# Altium PCB Controller_TRK.PcbDoc (part 1 of 2)
Units mm, origin at the board's own origin, x right, y up, seen from the top; angles counter-clockwise.
Board outline 95.06 x 95 mm, 2 copper layers (Top Layer, Bottom Layer); 192 components, 119 nets, 532 pads, 364 vias.
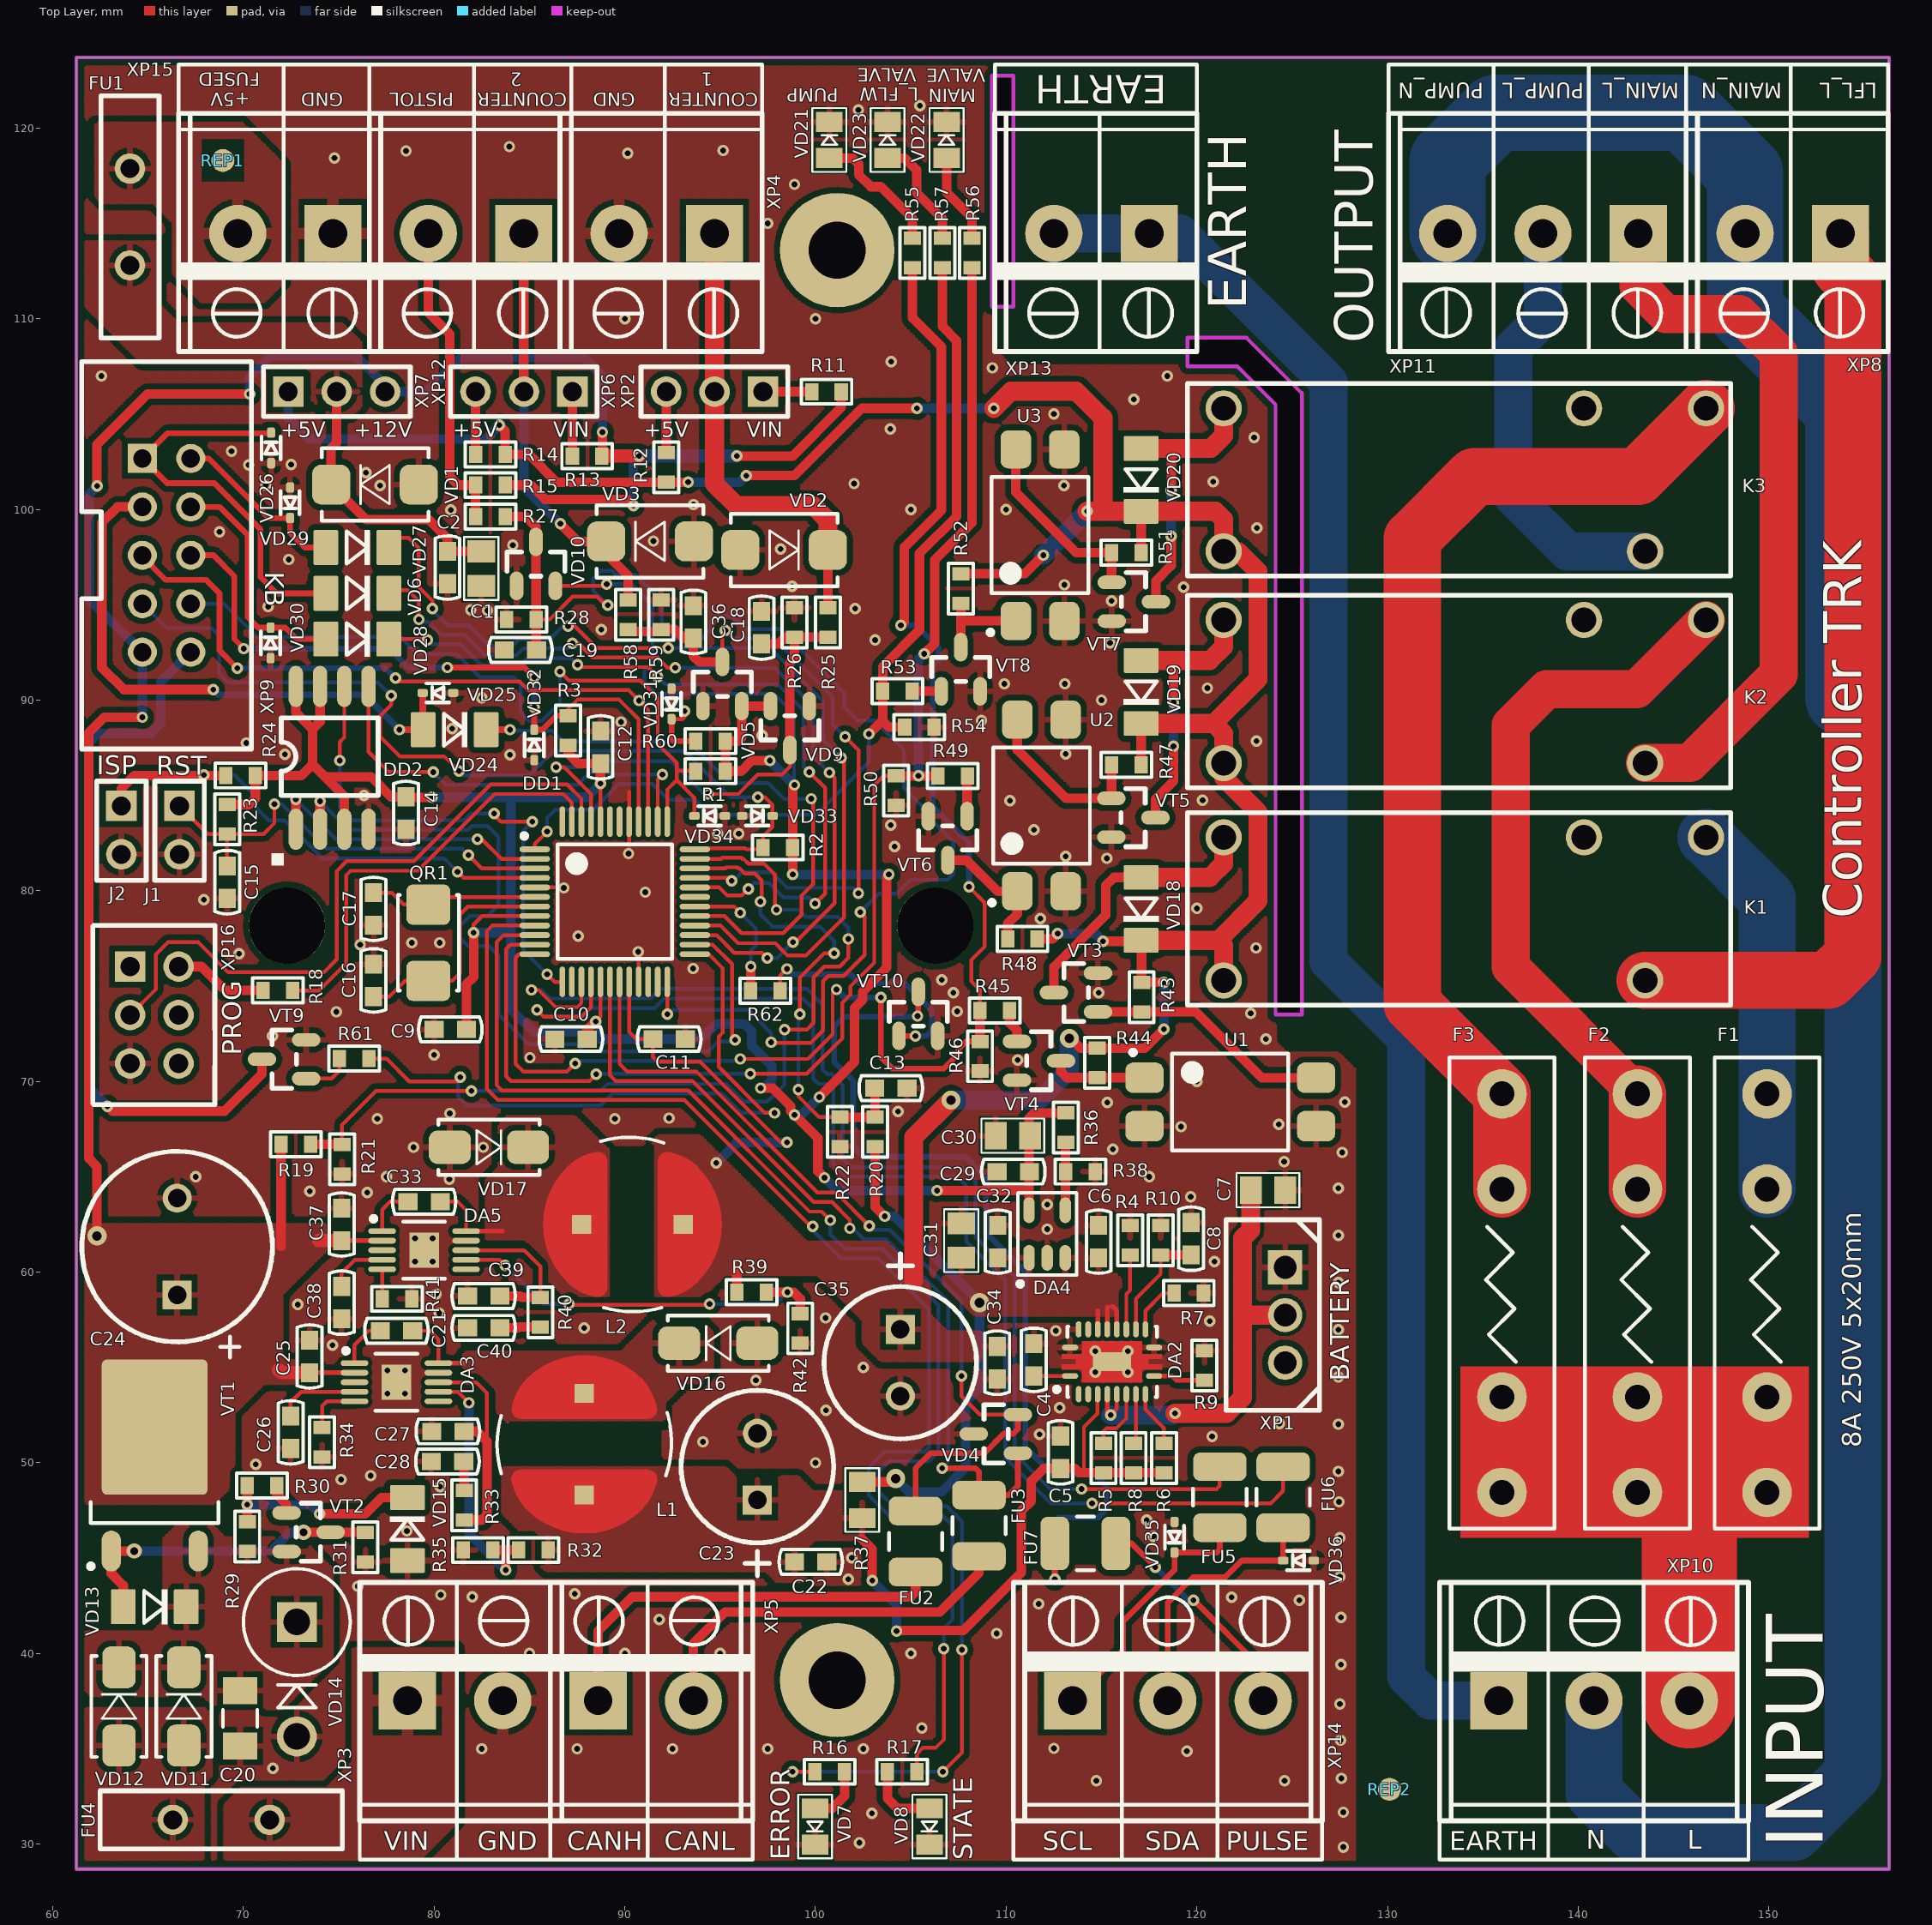
[diagram p0: Top Layer view]
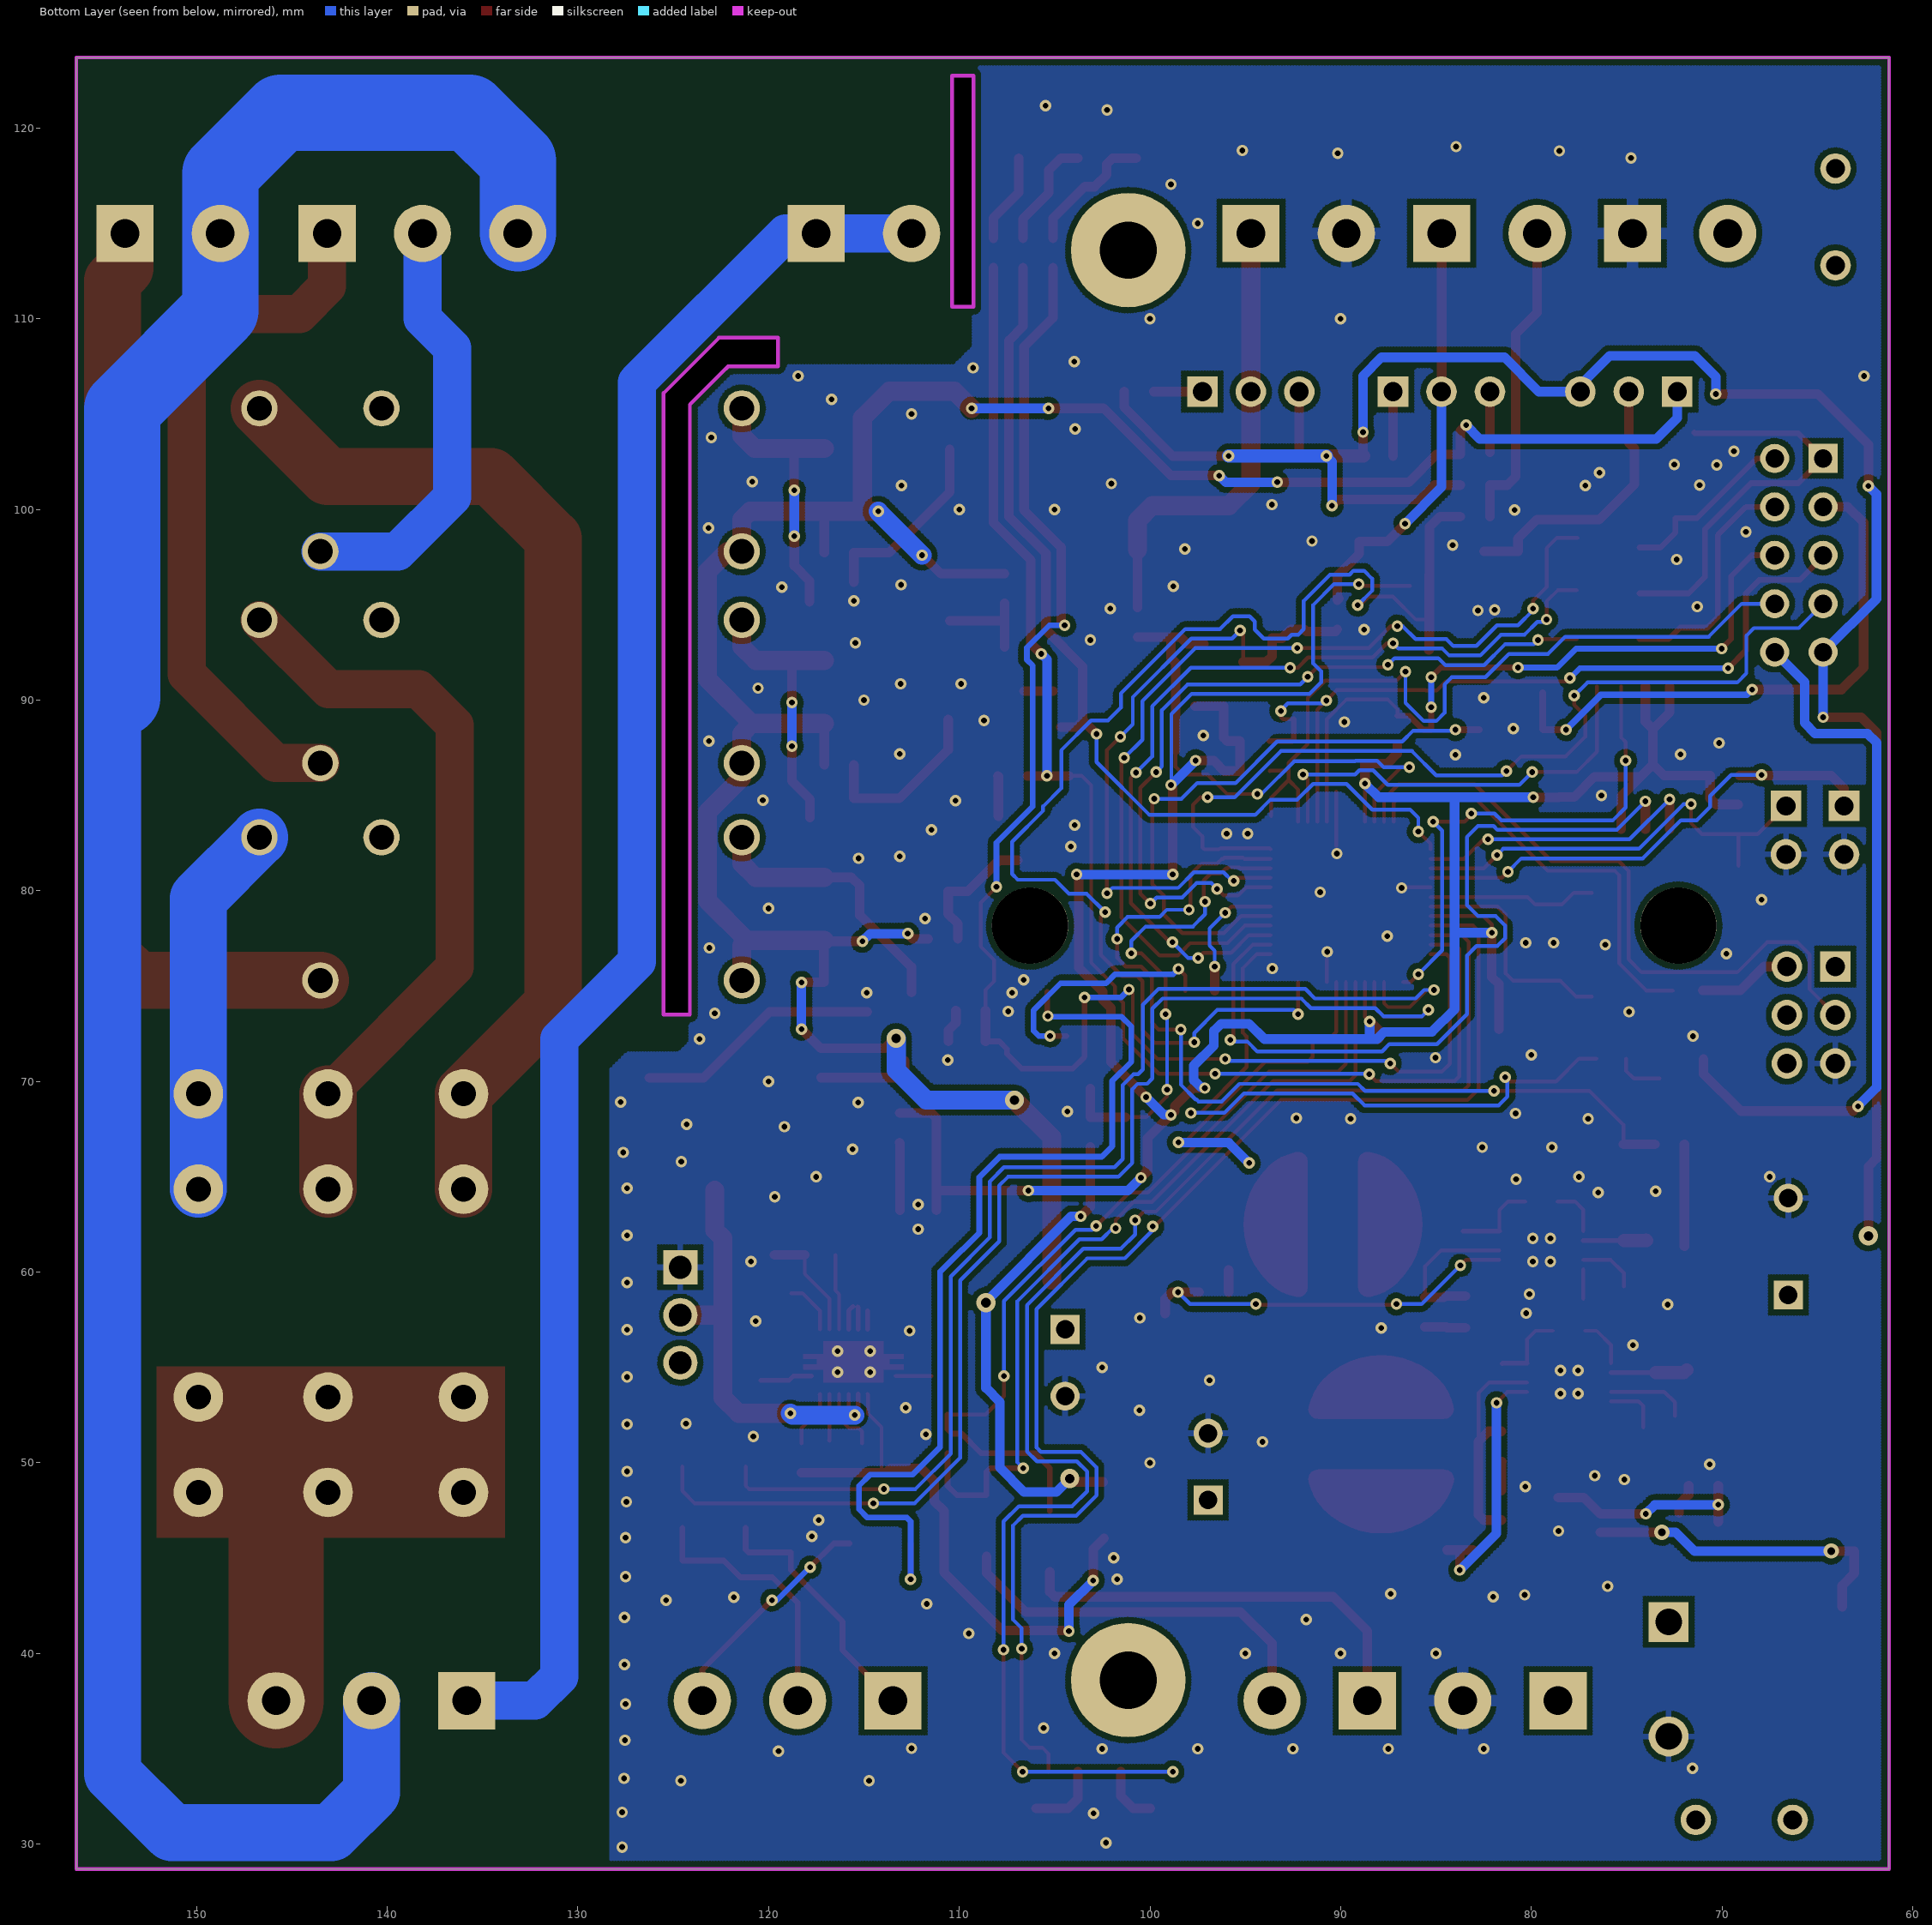
[diagram p1: Bottom Layer view, seen from below]

## Layer stack, top to bottom
Top Solder: solder mask 0.0102, Solder Resist, Dk 3.5
Top Layer: signal copper 0.0356
Dielectric 1: dielectric 0.32, FR-4, Dk 4.8
Bottom Layer: signal copper 0.0356
Bottom Solder: solder mask 0.0102, Solder Resist, Dk 3.5

## Board outline
61.238,28.702 156.3,28.702 156.3,123.702 61.238,123.702
cut-out: 109.25,110.625 110.375,110.625 110.375,122.75 109.25,122.75
cut-out: 119.5,109 122.6,109 123.6,108 125.5,106.1 125.5,73.5 124.125,73.5 124.125,105.5 122,107.5 119.5,107.5

## Design rules (kind name [scope] priority, off if disabled: settings)
Clearance Clearance_1 [InComponent('DA3') OR InComponent('DA5') OR InComponent('DA2') OR InComponent('DD1') OR InNet('NetC7_2')] p1: gap=0.2 ignorepadtopadclearanceinfootprint=FALSE except(0: Arc-Hole Track-Hole SMDPad-Hole THPad-Hole Via-Hole Fill-Hole Poly-Hole Region-Hole Text-Hole)
Clearance [All] p2: gap=0.3 ignorepadtopadclearanceinfootprint=FALSE except(0: Arc-Hole Track-Hole SMDPad-Hole THPad-Hole Via-Hole Fill-Hole Poly-Hole Region-Hole Text-Hole)
ComponentClearance [All] p1: gap=0.1 collisioncheckmode=3 verticalgap=2540 showdistances=FALSE
HoleSize [All] p1: absolutevalues=TRUE maxlimit=10 minlimit=0.025 maxpercent=80.000 minpercent=20.000
MinimumSolderMaskSliver [All] p1: minsoldermaskwidth=0.1
PolygonConnect PolygonConnect_2 [InComponent('XP3') OR InComponent('XP15') OR InComponent('XP4')] p1: connectstyle=Relief reliefconductorwidth=0.6 reliefentries=4 polygonreliefangle="90 Angle" airgapwidth=0.3
PolygonConnect PolygonConnect_1 [IsVia OR InComponent('DA1') AND InNet('NetDA1_2') OR InComponent('DA3') AND InNet('GND') OR InComponent('DA5') AND InNet('GND') OR InComponent('VT1') AND InNet('VIN_F')] p2: connectstyle=Direct reliefconductorwidth=0.254 reliefentries=4 polygonreliefangle="90 Angle" airgapwidth=0.254
PolygonConnect [All] p3: connectstyle=Relief reliefconductorwidth=0.3 reliefentries=4 polygonreliefangle="90 Angle" airgapwidth=0.3
RoutingVias [All] p1: holewidth=0.4 width=0.8 viastyle="Through Hole" minholewidth=0.3 minwidth=0.6 maxholewidth=0.5 maxwidth=1
SilkToSilkClearance [All] p1: silktosilkclearance=0.05
SolderMaskExpansion [All] p1: expansion=0.102
Width [All] p1: maxlimit=7 minlimit=0.2 preferedwidth=0.5
26 further rules are at their usual default settings.

## Classes and differential pairs
component class Keyboard: R1 R2 R3 R60 R61 VD6 VD24 VD25 VD26 VD27 VD28 VD29 VD30 VD31 VD32 VD33 VD34 VT9
component class 5V_Source: C1 C2 FU1 VD1 XP7
component class Battery: C4 C5 C6 C7 C8 DA2 R4 R5 R6 R7 R8 R9 R10 XP1
component class Connections: FU2 FU3 FU5 FU6 FU7 R11 R12 R13 R14 R15 R62 VD2 VD3 VD4 VD35 VD36 VT10 XP2 XP3 XP4 XP5 XP6 XP8 XP9 XP10 XP11 XP12 XP13 XP14 XP15
component class CPU: C9 C10 C11 C12 C13 C14 C15 C16 C17 DD1 DD2 J1 J2 QR1 R16 R17 R18 R19 R20 R21 R22 R23 R24 REP1 REP2 VD7 VD8 XP16
component class Input: C18 C19 C36 R25 R26 R27 R28 R58 R59 VD5 VD9 VD10
component class Power_1: C33 C34 C35 C37 C38 C39 C40 DA5 L2 R39 R40 R41 R42 VD17
component class Power: C20 C21 C22 C23 C24 C25 C26 C27 C28 C29 C30 C31 C32 DA3 DA4 FU4 L1 R29 R30 R31 R32 R33 R34 R35 R36 R37 R38 VD11 VD12 VD13 VD14 VD15 VD16 VT1 VT2
component class Relay: F1 F2 F3 K1 K2 K3 R43 R44 R45 R46 R47 R48 R49 R50 R51 R52 R53 R54 R55 R56 R57 U1 U2 U3 VD18 VD19 VD20 VD21 VD22 VD23 VT3 VT4 VT5 VT6 VT7 VT8

## Components (designator, comment, footprint, x,y, rotation, side; value= is the part's Value field where it differs from the comment)
C1 "10uF" CC0805 82.475,96.9 r90 top
C2 "0.1uF" CC0603 80.7,96.95 r90 top
C4 "0.1uF" CC0603 111.45,55.4 r90 top
C5 "1uF" CC0603 112.85,50.55 r90 top
C6 "1uF" CC0603 114.85,61.6 r270 top
C7 "10uFx6.3V" CC0805 123.725,64.3 r180 top
C8 "10nF" CC0603 119.7,61.75 r90 top
C9 "0.1uF" CC0603 80.85,72.725 r180 top
C10 "0.1uF" CC0603 87.175,72.223 r0 top
C11 "0.1uF" CC0603 92.325,72.225 r180 top
C12 "0.1uF" CC0603 88.725,87.525 r270 top
C13 "0.1uF" CC0603 103.95,69.65 r180 top
C14 "CC0603" CC0603 78.525,84.075 r90 top
C15 "220pF" CC0603 69.15,80.45 r90 top
C16 "22pF" CC0603 76.825,75.3 r270 top
C17 "22pF" CC0603 76.827,79.05 r90 top
C18 "0.1uF" CC0603 97.175,93.8 r270 top
C19 "0.1uF" CC0603 84.525,92.625 r0 top
C20 "0.1uFx250V" CC1206 69.825,36.6 r90 top
C21 "0.1 uF" CC0603 78.025,56.925 r180 top
C22 "0.1 uF" CC0603 99.75,44.8 r0 top
C23 "1000uFx6.3V" CC8X3.5 96.95,48.05 r90 top
C24 "470uFx35V" CC16X10_CAP0.5(1)(Primary) 66.525,58.8 r90 top
C25 "0.1 uF" CC0603 73.475,55.575 r90 top
C26 "10 nF" CC0603 72.475,51.6 r270 top
C27 "330pF" CC0603 80.725,51.65 r180 top
C28 "560pF" CC0603 80.7,50.075 r180 top
C29 "0.1uF" CC0603 110.375,65.275 r180 top
C30 "10uFx6.3V" CC0805 110.35,67.15 r0 top
C31 "10uF 6.3V" CC0805 107.65,61.65 r270 top
C32 "0.1uF" CC0603 109.55,61.6 r90 top
C33 "0.1 uF" CC0603 79.475,63.7 r180 top
C34 "0.1 uF" CC0603 109.525,55.25 r270 top
C35 "1000uFx6.3V" CC8X3.5 104.45,57 r270 top
C36 "0.1uF" CC0603 93.6,94.1 r270 top
C37 "0.1 uF" CC0603 75.15,62.5 r90 top
C38 "10 nF" CC0603 75.15,58.4 r270 top
C39 "330pF" CC0603 82.6,58.75 r180 top
C40 "560pF" CC0603 82.6,57.075 r180 top
DA2 "BQ24070" P-PQFP-N20 115.55,55.3 r0 top
DA3 "TPS54260DGQ" S-PDSO-G10 75.825,55.225 r0 top
DA4 "AP2210K-ADJTRG1" SOT23-5 112.15,62 r90 top
DA5 "TPS54260DGQ" S-PDSO-G10 77.275,62.15 r0 top
DD1 "LPC11C24FBD48" LQFP-48 89.475,79.425 r0 top
DD2 "M25PE16-VMW" EIAJ_SO8 72.75,83.225 r90 top
F1 "KLS5-266(5x20) 2pcs" Fuse_5x20 149.9,48.45 r90 top
F2 "KLS5-266(5x20) 2pcs" Fuse_5x20 143.1,48.45 r90 top
F3 "KLS5-266(5x20) 2pcs" Fuse_5x20 136,48.45 r90 top
FU1 "RXE-030" RXE-110 64.05,117.875 r270 top
FU2 "MICROSMD010F-2" RC1210#1 105.25,45.875 r270 top
FU3 "MICROSMD010F-2" RC1210#1 108.575,46.7 r270 top
FU4 "RXE-110" RXE-110 71.375,31.275 r180 top
FU5 "MICROSMD010F-2" RC1210#2 121.2,48.2 r90 top
FU6 "MICROSMD010F-2" RC1210#2 124.525,48.2 r90 top
FU7 "MICROSMD010F-2" RC1210#2 114.15,45.775 r0 top
J1 "PLS-02" PLS-02 66.65,84.45 r270 top
J2 "PLS-02" PLS-02 63.6,84.45 r270 top
K1 "RY21" RY21_RY21(Primary) 121.4,82.8 r0 top
K2 "RY21" RY21_RY21(Primary) 121.4,94.2 r0 top
K3 "RY21" RY21_RY21(Primary) 121.4,105.3 r0 top
L1 "15uH" SDR0805 87.875,50.975 r270 top
L2 "15uH" SDR0805 90.4,62.5 r0 top
QR1 "NX5032GA-12.000MHz LN-CD-1" AC5032_2 79.7,77.275 r270 top
R1 "10k" RC0603#1 94.5,86.275 r180 top
R2 "10k" RC0603#1 98.025,82.275 r180 top
R3 "10k" RC0603#1 87.025,88.4 r90 top
R4 "51k" RC0603#2 116.5,61.675 r90 top
R5 "100k" RC0603#2 115.1,50.25 r270 top
R6 "100k" RC0603#2 118.275,50.25 r270 top
R7 "10k" RC0603#2 119.575,58.9 r0 top
R8 "100k" RC0603#2 116.675,50.25 r270 top
R9 "2k" RC0603#2 120.4,55.1 r90 top
R10 "36k" RC0603#2 118.1,61.675 r90 top
R11 "10k" RC0603#2 100.575,106.175 r180 top
R12 "10k" RC0603#2 92.175,102.2 r90 top
R13 "10k" RC0603#2 88.025,102.8 r180 top
R14 "10k" RC0603#2 82.95,102.875 r180 top
R15 "10k" RC0603#2 82.95,101.275 r0 top
R16 "1k" RC0603#2 100.75,33.8 r180 top
R17 "1k" RC0603#2 104.55,33.8 r0 top
R18 "100E" RC0603#2 71.8,74.775 r180 top
R19 "100k" RC0603#2 72.75,66.7 r180 top
R20 "10k" RC0603#2 103.125,67.35 r270 top
R21 "10k" RC0603#2 75.175,65.925 r90 top
R22 "10k" RC0603#2 101.275,67.35 r90 top
R23 "10k" RC0603#2 69.15,83.75 r270 top
R24 "10k" RC0603#2 69.85,86.05 r180 top
R25 "100k" RC0603#2 100.65,94.075 r270 top
R26 "33k" RC0603#2 98.9,94.075 r270 top
R27 "100k" RC0603#2 82.95,99.625 r0 top
R28 "33k" RC0603#2 84.575,94.225 r0 top
R29 "220k" RC0603#2 70.2,46.125 r270 top
R30 "220k" RC0603#2 70.975,48.8 r180 top
R31 "220k" RC0603#2 76.4,45.575 r90 top
R32 "48k7 1%" RC0603#2 85.2,45.425 r0 top
R33 "12k" RC0603#2 81.575,47.775 r270 top
R34 "240k" RC0603#2 74.125,51.075 r90 top
R35 "11k 1%" RC0603#2 82.3,45.425 r0 top
R36 "11k 1%" RC0603#2 113.125,67.575 r90 top
R37 "n.p" RC0805 102.45,48.05 r90 top
R38 "18k 1%" RC0603#2 113.9,65.275 r180 top
R39 "68k1 1%" RC0603#2 96.65,58.95 r180 top
R40 "12k" RC0603#2 85.575,57.9 r90 top
R41 "240k" RC0603#2 78.05,58.6 r180 top
R42 "13k 1%" RC0603#2 99.2,57.05 r90 top
R43 "4k7" RC0603#2 117.1,74.425 r90 top
R44 "220E" RC0603#2 114.775,70.975 r90 top
R45 "10k" RC0603#2 109.4,73.725 r180 top
R46 "100k" RC0603#2 108.625,71.325 r90 top
R47 "4k7" RC0603#2 116.3,86.6 r0 top
R48 "220E" RC0603#2 110.85,77.475 r0 top
R49 "10k" RC0603#2 107.2,86.025 r180 top
R50 "100k" RC0603#2 104.225,85.25 r90 top
R51 "4k7" RC0603#2 116.3,97.725 r0 top
R52 "220E" RC0603#2 107.625,95.85 r90 top
R53 "10k" RC0603#2 104.3,90.475 r180 top
R54 "100k" RC0603#2 105.45,88.575 r180 top
R55 "1k" RC0603#2 105.075,113.45 r90 top
R56 "1k" RC0603#2 108.2,113.45 r90 top
R57 "1k" RC0603#2 106.65,113.45 r90 top
R58 "100k" RC0603#2 90.175,94.475 r270 top
R59 "33k" RC0603#2 91.9,94.475 r270 top
R60 "10k" RC0603#1 94.5,87.85 r180 top
R61 "4k7" RC0603#1 75.8,71.2 r180 top
R62 "4k7" RC0603#1 97.375,74.75 r0 top
REP1 "REPER_POINT_1.2" REPER1.2 68.925,118.3 r90 top
REP2 "REPER_POINT_1.2" REPER1.2 130.1,32.875 r90 top
U1 "K10102C" PC817 121.75,68.925 r0 top
U2 "K10102C" PC817 111.85,84.475 r90 top
U3 "K10102C" PC817 111.775,98.65 r90 top
VD1 "SMBJ15CA" SMB 76.9,101.3 r0 top
VD2 "SMBJ15CA" SMB 98.35,97.875 r180 top
VD3 "SMBJ15CA" SMB 91.325,98.325 r0 top
VD4 "PESD2CAN" SOT-23(123)#1 110.625,50.5 r0 top
VD5 "BAT54S" SOT-23(GSD) 94.1,89.675 r0 top
VD6 "LL4148" SOD-80#1 75.975,95.6 r180 top
VD7 "LED_0805" LED0805 99.975,31.875 r270 top
VD8 "LED_0805" LED0805 105.975,31.875 r270 top
VD9 "BAT54S" SOT-23(GSD) 99.675,89.7 r180 top
VD10 "BAT54S" SOT-23(GSD) 84.325,95.975 r0 top
VD11 "GS1M" SMA 66.875,37.225 r90 top
VD12 "n.p" SMA 63.475,37.225 r90 top
VD13 "BZV55C15" SOD-80#2 65.35,42.45 r180 top
VD14 "1.5KE150A" DO-201 72.8,35.65 r90 top
VD15 "BZV55C39" SOD-80#2 78.6,46.525 r270 top
VD16 "SK34SMA" SMA 94.9,56.275 r180 top
VD17 "SK34SMA" SMA 82.875,66.55 r0 top
VD18 "LL4148" SOD-80#2 117.075,79.05 r90 top
VD19 "LL4148" SOD-80#2 117.075,90.425 r90 top
VD20 "LL4148" SOD-80#2 117.075,101.55 r90 top
VD21 "LED_0805" LED0805 100.725,118.425 r90 top
VD22 "LED_0805" LED0805 106.875,118.425 r90 top
VD23 "LED_0805" LED0805 103.775,118.425 r90 top
VD24 "LL4148" SOD-80#1 81.075,88.45 r180 top
VD25 "ESD5Z3.3T1G/T5G" SOD-523 80.2,90.375 r180 top
VD26 "ESD5Z3.3T1G/T5G" SOD-523 71.45,103.225 r90 top
VD27 "LL4148" SOD-80#1 75.975,98 r180 top
VD28 "LL4148" SOD-80#1 75.975,93.2 r180 top
VD29 "ESD5Z3.3T1G/T5G" SOD-523 72.45,100.35 r270 top
VD30 "ESD5Z3.3T1G/T5G" SOD-523 71.425,93 r90 top
VD31 "ESD5Z3.3T1G/T5G" SOD-523 92.45,89.8 r270 top
VD32 "ESD5Z3.3T1G/T5G" SOD-523 85.25,87.65 r90 top
VD33 "ESD5Z3.3T1G/T5G" SOD-523 96.95,83.925 r0 top
VD34 "ESD5Z3.3T1G/T5G" SOD-523 94.45,83.925 r180 top
VD35 "ESD5Z3.3T1G/T5G" SOD-523 118.825,46.1 r270 top
VD36 "ESD5Z3.3T1G/T5G" SOD-523 125.325,44.875 r180 top
VT1 "IRFR9220" D-PAK(TO-252AA) 65.35,49.875 r90 top
VT2 "BC857" SOT-23(123)#1 72.25,47.375 r180 top
VT3 "BC817-40" SOT-23(123)#1 114.825,73.65 r0 top
VT4 "BC817-40" SOT-23(123)#1 110.55,72.1 r180 top
VT5 "BC817-40" SOT-23(123)#1 115.5,84.85 r180 top
VT6 "BC817-40" SOT-23(123)#1 107.95,83.925 r90 top
VT7 "BC817-40" SOT-23(123)#1 115.525,96.175 r180 top
VT8 "BC817-40" SOT-23(123)#1 106.6,90.45 r270 top
VT9 "BC817-40" SOT-23(123)#2 73.3,70.15 r0 top
VT10 "BC817-40" SOT-23(123)#2 104.375,72.375 r270 top
XP1 "MW03D" MW03D 124.625,60.25 r270 top
XP2 "PLS03" PLS-03#1 97.25,106.175 r180 top
XP3 "DG330-2PIN" DG330-2PIN 81.2,37.5 r0 top
XP4 "DG330-2PIN" DG330-2PIN 92.1,114.5 r180 top
XP5 "DG330-2PIN" DG330-2PIN 91.2,37.5 r0 top
XP6 "PLS03" PLS-03#1 87.25,106.175 r180 top
XP7 "PLS03" PLS-03#2 72.35,106.175 r0 top
XP8 "DG330-2PIN" DG330-2PIN 151.15,114.5 r180 top
XP9 "BH-10" BH-10 64.7,102.675 r270 top
XP10 "DG330-3PIN" DG330-3PIN 140.825,37.525 r0 top
XP11 "DG330-3PIN" DG330-3PIN 138.15,114.475 r180 top
XP12 "DG330-2PIN" DG330-2PIN 82.1,114.5 r180 top
XP13 "DG330-2PIN" DG330-2PIN 114.9,114.5 r180 top
XP14 "DG330-3PIN" DG330-3PIN 118.475,37.525 r0 top
XP15 "DG330-2PIN" DG330-2PIN 72.1,114.5 r180 top
XP16 "PLD-06" PIN6 64.06,76.025 r270 top

## Footprints (in the part's own frame and the unit in brackets; to place one, negate y for a bottom-side part, rotate by r counter-clockwise, add the part's x,y. Pads: shape width x height; smd on the part's side, far side on the other; paste and mask are expansions set on the pad)
AC5032_2 [mm]
  rrect30% 2.1x2.3 smd mask+0.05: 1(-2,0) 2(2,0)
  silkscreen extent -2.5,-1.6 2.5,1.6
BH-10 [mil]
  rect 60x60 hole 38: 1(0,0)
  round 60 hole 38: 2(0,100) 3(100,0) 4(100,100) 5(200,0) 6(200,100) 7(300,0) 8(300,100) 9(400,0) 10(400,100)
  silkscreen extent -200,-125 600,225
CC8X3.5 [mil]
  rect 60x60 hole 38 mask+1.97: 1(0,0)
  round 60 hole 38 mask+1.97: 2(137.8,0)
  silkscreen extent -156,-157 226,157
CC16X10_CAP0.5(1)(Primary) [mil]
  round 60 hole 38 mask+1.97: 1(200,0)
  rect 60x60 hole 38 mask+1.97: 2(0,0)
  silkscreen extent -97,-197 297,197
CC0603 [mm]
  rect 1x0.9 smd paste-25.4 mask+0.05: 1(-0.85,0) 2(0.85,0)
  silkscreen extent -1.66,-0.65 1.66,0.65
CC0805 [mm]
  rect 1.15x1.45 smd paste-25.4 mask+0.05: 1(-0.9,0) 2(0.9,0)
  silkscreen extent -1.65,-0.9 1.65,0.9
CC1206 [mm]
  rect 1.4x1.8 smd paste-25.4 mask+0.05: 1(-1.45,0) 2(1.45,0)
  silkscreen extent -0.45,-0.9 0.45,0.9
D-PAK(TO-252AA) [mm]
  oval 2.15x1 smd mask+0.05: 1(-4.5,2.28) 3(-4.5,-2.28)
  rrect10% 7.1x5.55 smd mask+0.05: 2(2,0)
  silkscreen extent -5.42,-3.35 -1.92,3.47
DG330-2PIN [mm]
  rect 3x3 hole 1.5 mask+0.05: 1(-2.6,0.025)
  round 3 hole 1.5 mask+0.05: 2(2.4,0.025)
  silkscreen extent -5.1,-6.27 5.6,6.23
DG330-3PIN [mm]
  rect 3x3 hole 1.5: 1(-5,0)
  round 3 hole 1.5: 2(0,0) 3(5,0)
  silkscreen extent -8.1,-6.3 8.1,6.2
DO-201 [mm]
  round 2.1 hole 1.4 mask+0.05: 1(0,0)
  rect 2.1x2.1 hole 1.4 mask+0.05: 2(6,0)
  silkscreen extent 1.5,-2.8 8.8,2.8
EIAJ_SO8 [mil]
  oval 85x29.53 smd mask+1.97: 1(0,0) 2(0,-50) 3(0,-100) 4(0,-150) 5(295,-150) 6(295,-100) 7(295,-50) 8(295,0)
  silkscreen extent -75,-170 230,50
Fuse_5x20 [mm]
  round 2.6 hole 1.3 mask+0.05: 1(0,0) 1(5,0) 2(15.9,0) 2(20.9,0)
  silkscreen extent -1.9,-2.75 22.8,2.75
LED0805 [mm]
  rect 1.05x1.4 smd paste-25.4 mask+0.05: 1(0,0) 2(1.9,0)
  silkscreen extent -0.72,-0.89 2.62,0.89
LQFP-48 [mm]
  oval 1.6x0.3 smd mask+0.05: 1(-4.2,2.75) 2(-4.2,2.25) 3(-4.2,1.75) 4(-4.2,1.25) 5(-4.2,0.75) 6(-4.2,0.25) 7(-4.2,-0.25) 8(-4.2,-0.75) 9(-4.2,-1.25) 10(-4.2,-1.75) 11(-4.2,-2.25) 12(-4.2,-2.75) 25(4.2,-2.75) 26(4.2,-2.25) 27(4.2,-1.75) 28(4.2,-1.25) 29(4.2,-0.75) 30(4.2,-0.25) 31(4.2,0.25) 32(4.2,0.75) 33(4.2,1.25) 34(4.2,1.75) 35(4.2,2.25) 36(4.2,2.75)
  oval 0.3x1.6 smd mask+0.05: 13(-2.75,-4.2) 14(-2.25,-4.2) 15(-1.75,-4.2) 16(-1.25,-4.2) 17(-0.75,-4.2) 18(-0.25,-4.2) 19(0.25,-4.2) 20(0.75,-4.2) 21(1.25,-4.2) 22(1.75,-4.2) 23(2.25,-4.2) 24(2.75,-4.2) 37(2.75,4.2) 38(2.25,4.2) 39(1.75,4.2) 40(1.25,4.2) 41(0.75,4.2) 42(0.25,4.2) 43(-0.25,4.2) 44(-0.75,4.2) 45(-1.25,4.2) 46(-1.75,4.2) 47(-2.25,4.2) 48(-2.75,4.2)
  silkscreen extent -4.87,-3 3,3.57
MW03D [mm]
  rect 1.8x1.8 hole 1.2 mask+0.05: 1(0,0)
  round 1.8 hole 1.2 mask+0.05: 2(2.5,0) 3(5,0)
  silkscreen extent -2.5,-3.1 7.5,1.8
P-PQFP-N20 [mm]
  oval 0.85x0.3 smd mask+0.05: 1(-2.2,-0.75) 10(2.2,-0.75) 11(2.2,0.75) 20(-2.2,0.75)
  oval 0.3x0.85 smd mask+0.05: 2(-1.75,-1.7) 3(-1.25,-1.7) 4(-0.75,-1.7) 5(-0.25,-1.7) 6(0.25,-1.7) 7(0.75,-1.7) 8(1.25,-1.7) 9(1.75,-1.7) 12(1.75,1.7) 13(1.25,1.7) 14(0.75,1.7) 15(0.25,1.7) 16(-0.25,1.7) 17(-0.75,1.7) 18(-1.25,1.7) 19(-1.75,1.7)
  rect 2x1 smd paste-25.4 mask+0.05: 21(0,0)
  Top Layer region: -1.575,-1.075 1.575,-1.075 1.575,-0.4 2.625,-0.4 2.625,-0.15 1.9,-0.15 1.9,0.15 2.625,0.15 2.625,0.4 1.575,0.4 1.575,1.075 -1.575,1.075 -1.575,0.4 -2.625,0.4 -2.625,0.15 -1.9,0.15 -1.9,-0.15 -2.625,-0.15 -2.625,-0.4 -1.575,-0.4
  silkscreen extent -3.02,-1.85 2.35,1.85
PC817 [mm]
  rrect50% 2x1.6 smd mask+0.05: 1(-4.5,1.27) 2(-4.5,-1.27) 3(4.5,-1.27) 4(4.5,1.27)
  silkscreen extent -5.22,-2.54 3.05,2.72
PIN6 [mm]
  rect 1.6x1.6 hole 1 mask+0.05: 1(0,0)
  round 1.6 hole 1 mask+0.05: 2(0,2.54) 3(2.54,0) 4(2.54,2.54) 5(5.08,0) 6(5.08,2.54)
  silkscreen extent -2.16,-1.96 7.24,4.45
PLS-02 [mm]
  rect 1.6x1.6 hole 1 mask+0.05: 1(0,0)
  round 1.6 hole 1 mask+0.05: 2(2.54,0)
  silkscreen extent -1.3,-1.3 3.9,1.3
PLS-03#1 [mm]
  rect 1.6x1.6 hole 1 mask+0.05: 1(0,0)
  round 1.6 hole 1 mask+0.05: 2(2.54,0) 3(5.08,0)
  silkscreen extent -1.3,-1.3 6.4,1.3
PLS-03#2 [mm]
  rect 1.6x1.6 hole 1: 1(0,0)
  round 1.6 hole 1: 2(2.54,0) 3(5.08,0)
  silkscreen extent -1.3,-1.3 6.4,1.3
RC0603#1 [mm]
  rect 0.7x0.9 smd paste-25.4: 1(-0.775,0) 2(0.774,0)
  silkscreen extent -1.32,-0.65 1.33,0.65
RC0603#2 [mm]
  rect 0.7x0.9 smd paste-25.4 mask+0.05: 1(-0.775,0) 2(0.774,0)
  silkscreen extent -1.32,-0.65 1.33,0.65
RC0805 [mm]
  rect 1.05x1.4 smd paste-25.4 mask+0.05: 1(-0.95,0) 2(0.95,0)
  silkscreen extent -1.67,-0.89 1.67,0.89
RC1210#1 [mm]
  rrect50% 1.5x2.8 smd mask+0.05: 1(-1.6,0) 2(1.6,0)
  silkscreen extent -0.45,-1.4 0.45,1.4
RC1210#2 [mm]
  rrect50% 1.5x2.8 smd: 1(-1.6,0) 2(1.6,0)
  silkscreen extent -0.45,-1.4 0.45,1.4
REPER1.2 [mm]
  round 1.2 smd paste-25.4 mask-25.4: 1(0,0)
  Top Layer pour cut-out: -1.2,-1.2 1.2,-1.2 1.2,1.2 -1.2,1.2
RXE-110 [mm]
  round 1.6 hole 1 mask+0.05: 1(0,0) 2(5.08,0)
  silkscreen extent -3.81,-1.52 8.89,1.52
RY21_RY21(Primary) [mm]
  round 1.9 hole 1.3 mask+0.05: 1(0,-7.5) 2(0,0) 11(22.1,-7.5) 12(18.9,0) 14(25.3,0)
  silkscreen extent -1.9,-8.8 26.6,1.3
S-PDSO-G10 [mm]
  oval 1.45x0.3 smd mask+0.05: 1(0,0) 2(0,-0.5) 3(0,-1) 4(0,-1.5) 5(0,-2) 6(4.4,-2) 7(4.4,-1.5) 8(4.4,-1) 9(4.4,-0.5) 10(4.4,0)
  rect 1.55x1.85 smd mask+0.05: 11(2.2,-1)
  silkscreen extent -0.57,-2.5 3.3,0.77
SDR0805 [mm]
  rect 1x1 smd paste-25.4 mask+0.05: 1(-2.667,0) 2(2.667,0)
  Top Layer region: 1.327,-3.319 1.362,-3.503 1.461,-3.66 1.612,-3.771 1.792,-3.818 1.977,-3.797 2.318,-3.69 2.706,-3.535 3.065,-3.321 3.387,-3.053 3.392,-3.047 3.771,-2.627 4.09,-2.16 4.345,-1.654 4.53,-1.119 4.642,-0.565 4.68,0 4.642,0.565 4.53,1.119 4.345,1.654 4.09,2.16 3.771,2.627 3.392,3.047 3.381,3.059 3.063,3.323 2.709,3.534 2.325,3.688 1.996,3.791 1.806,3.813 1.62,3.764 1.465,3.65 1.363,3.488 1.327,3.299
  Top Layer region: -1.327,3.319 -1.362,3.503 -1.461,3.66 -1.612,3.771 -1.792,3.818 -1.977,3.797 -2.318,3.69 -2.706,3.535 -3.065,3.321 -3.387,3.053 -3.392,3.047 -3.771,2.627 -4.09,2.16 -4.345,1.654 -4.53,1.119 -4.642,0.565 -4.68,0 -4.642,-0.565 -4.53,-1.119 -4.345,-1.654 -4.09,-2.16 -3.771,-2.627 -3.392,-3.047 -3.381,-3.059 -3.063,-3.323 -2.709,-3.534 -2.325,-3.688 -1.996,-3.791 -1.806,-3.813 -1.62,-3.764 -1.465,-3.65 -1.363,-3.488 -1.327,-3.299
  silkscreen extent -1.66,-4.57 1.64,4.57
SMA [mm]
  rrect50% 2.2x1.75 smd mask+0.05: 1(-2.05,0) 2(2.05,0)
  silkscreen extent -2.65,-1.45 2.65,1.45
SMB [mm]
  rrect50% 2x2.1 smd mask+0.05: 1(2.3,0) 2(-2.3,0)
  silkscreen extent -2.8,-1.9 2.8,1.9
SOD-80#1 [mm]
  rrect10% 1.3x1.83 smd paste-25.4: 1(1.651,0) 2(-1.651,0)
  silkscreen extent -0.66,-0.91 0.56,0.91
SOD-80#2 [mm]
  rrect10% 1.3x1.83 smd paste-25.4 mask+0.05: 1(1.651,0) 2(-1.651,0)
  silkscreen extent -0.66,-0.91 0.56,0.91
SOD-523 [mm]
  rrect50% 0.55x0.42 smd: 1(-0.8,0) 2(0.8,0)
  silkscreen extent -0.6,-0.5 0.6,0.5
SOT23-5 [mm]
  oval 1.35x0.6 smd mask+0.05: 1(-1.25,0.95) 2(-1.25,0) 3(-1.25,-0.95) 4(1.25,-0.95) 5(1.25,0.95)
  silkscreen extent -2.74,-1.55 2.16,1.55
SOT-23(123)#1 [mil]
  oval 59.06x28.07 smd mask+1.97: 1(-0.5,0) 2(-0.5,80) 3(-91.5,40)
  silkscreen extent -70,-20 -20,100
SOT-23(123)#2 [mil]
  oval 59.06x28.07 smd: 1(-0.5,0) 2(-0.5,80) 3(-91.5,40)
  silkscreen extent -70,-20 -20,100
SOT-23(GSD) [mil]
  oval 28.07x59.06 smd mask+1.97: 1(0,0.5) 2(80,0.5) 3(40,91.5)
  silkscreen extent -20,20 100,70

## Part data
C1 C7 C30 C31: library part CC0805, "CC0805"
C2 C4 C5 C6 C8 C9 C10 C11 C12 C13 C15 C16 C17 C18 C19 C21 C22 C25 C26 C27 C28 C29 C32 C33 C34 C36 C37 C38 C39 C40: library part CC0603, "CC0603"
C20: library part CC1206, "CC1206"
C23 C35: library part CAP0.35, "CAP0.35"
C24: library part CAP0.5(1), "CAP0.5(1)"
DA4: library part MCP1824T-ADJE/OT, "300 mA, Low Voltage, Low Quiescent Current LDO Regulator, 5-Pin SOT-223, Extended Temperature, Tape and Reel"
DD2: library part S25FL016A0LMFI01, "S25FL016A0LMFI01"
F1 F2 F3: library part "Fuse KLS5-266(5x20)"
FU1: library part RXE-110, "RXE-110"
FU2 FU3 FU5 FU6 FU7: library part MICROSMD, "MICROSMD"
L1 L2: library part SDR0805, "SDR0805"
QR1: library part AC5032_2, "AC5032/2"
R1 R2 R3 R4 R5 R6 R7 R8 R9 R10 R11 R12 R13 R14 R15 R16 R17 R18 R19 R20 R21 R22 R23 R24 R25 R26 R27 R28 R29 R30 R31 R32 R33 R34 R35 R36 R38 R39 R40 R41 R42 R43 R44 R45 R46 R47 R48 R49 R50 R51 R52 R53 R54 R55 R56 R57 R58 R59 R60 R61 R62: library part RC0603, "RC0603"
R37: library part RC0805, "RC0805"
REP1 REP2: library part REPER1.2, "REPER1.2"
VD1 VD2 VD3: library part SMBJ, "SMBJ"
VD4: "TVS for CAN"
VD5 VD9 VD10: "1.0 Ampere General Purpose Rectifier"
VD12: library part GS1M, "GS1M"
VD13 VD15: library part BZV55C12, "Zener Voltage Regulator Diode"
VD14: library part 1.5KE, "1.5KE"
VD16 VD17: "Schottky Rectifier"
VD25 VD26 VD29 VD30 VD31 VD32 VD33 VD34 VD35 VD36: library part ESD5Z, "Supressor"
VT1: "HEXFET Power MOSFET"
VT2: library part BC857B, "PNP 100ma transistor"
VT3 VT4 VT5 VT6 VT7 VT8 VT9 VT10: library part BC846BLT1, "NPN 500ma transistor"
XP16: "PLD06"

## Free pads (board coordinates)
  round 4 hole 4 unplated mask+0.05: 0(72.288,78.177) 0(106.288,78.177)
  round 6 hole 3 unplated mask+0.05: 0(101.138,38.602) 0(101.138,113.602)

## Via types
v1: diameter 0.6, hole 0.3, Top Layer to Bottom Layer, 357 vias
v2: diameter 1, hole 0.5, Top Layer to Bottom Layer, 5 vias
v3: diameter 0.8, hole 0.4, Top Layer to Bottom Layer, 2 vias

## Nets (pads, with @x,y where several pads share a name; then routed paths per layer and width w, separated by ;. In a path a pad name is that pad's centre, name@x,y a point inside that pad or via, vN(x,y) a via of type N, cw(c..) or ccw(c..) an arc to the next point about the centre after c; other vN are vias at no path point)
+3V3: C9.1 C10.2 C12.2 C14.2 C29.1 C30.2 DA4.5 DD1.8 DD1.17 DD1.44 DD2.3 DD2.7 DD2.8 R1.1 R2.1 R3.1 R23.1 R24.1 R36.2 R60.1 VD5.2 VD9.2 VD10.2 | length 162.5
  Top Layer w0.2: v1(82.075,77.8) 82.075,78.225 82.525,78.675 DD1.8@85.275,78.675 ; VD10.2@86.357,95.988 88.963,95.988 v1(89.05,96.075) ; v1(88.475,73.15) 88.725,73.4 DD1.17@88.725,75.225 ; DD1.44@88.725,83.625 v1(88.725,85.625)
  Top Layer w0.5: R23.1@69.15,84.525 70.3,84.525 70.625,84.85 R24.1@70.625,86.05 73.05,86.05 73.625,86.625 ; DD2.8@72.75,90.718 72.75,89.35 73.625,88.475 ; DD2.7@74.02,90.718 74.02,88.87 73.625,88.475 ; 74.325,85.975 76.7,85.975 77.75,84.925 C14.2@78.525,84.925 78.55,84.9 v1(79.9,84.9) ; DD2.3@75.29,83.225 75.29,84.96 73.625,86.625 ; C9.1@81.7,72.725 81.7,75.106 82.075,75.481 v1(82.075,77.8) ; R3.1@87.025,87.625 87.025,87.2 87.55,86.675 C12.2@88.725,86.675 v1(88.725,85.625) ; C10.2@88.025,72.223 88.025,72.7 v1(88.475,73.15) ; v1(97.125,69.65) 97.752,69.65 98.7,68.702 98.7,68.45 v1(98.9,68.25) 100.125,67.025 100.125,65.3 v1(100.475,64.95) ; v1(97.6,86.825) 96.65,86.825 96.1,86.275 R1.1@95.275,86.275 R60.1@95.275,87.85 95.95,87.85 96.132,88.032 VD5.2@96.132,89.688 VD9.2@97.643,89.687 ; v1(98.805,80.854) 98.805,82.27 R2.1@98.8,82.275 98.8,85.45 v1(98.9,85.55) ; v1(100.2,69.175) 102.05,71.025 102.05,73.856 102.475,74.281 102.475,74.706 103.73,75.961 103.73,80.738 v1(103.846,80.854) ; v1(106.375,64.275) 111.2,64.275 ; DA4.5@111.2,63.25 111.2,64.275 ; R36.2@113.125,68.349 111.474,68.349 111.2,68.075 111.2,64.275 ; 73.625,86.625 73.625,88.475
  Bottom Layer w0.2: v1(89.05,96.075) 90.35,96.075 91.435,94.99 91.435,91.925 91.025,91.515 91.025,90.935 91.635,90.325 97.818,90.325 98.875,89.268 98.875,85.575 v1(98.9,85.55)
  Bottom Layer w0.5: v1(79.9,84.9) 79.904,84.904 84.025,84.904 ; v1(82.075,77.8) 84.025,77.8 ; 88.475,72.25 v1(88.475,73.15) ; v1(88.725,85.625) 88.004,84.904 84.025,84.904 ; v1(97.125,69.65) 97.175,69.7 97.331,69.7 97.7,70.069 97.7,70.831 96.65,71.881 96.65,72.65 96.271,73.029 94.804,73.029 94,72.225 88.094,72.225 87.719,72.6 85.219,72.6 84.025,73.794 84.025,77.8 ; v1(97.6,86.825) 98.875,85.55 v1(98.9,85.55) ; v1@98.859,80.8 v1(98.805,80.854) v1(103.846,80.854) ; v1(98.9,68.25) 99.275,68.25 v1(100.2,69.175) ; v1(100.475,64.95) 101.15,64.275 v1(106.375,64.275) ; 84.025,77.8 84.025,84.904
+4V3: C5.1 C22.1 C23.1 DA2.4 L1.2 R5.2 R6.2 R8.2 R32.2 R37.1 | length 30.2
  Top Layer w0.2: 114.075,49.526 114.075,51.875 114.775,52.575 114.775,53.575 DA2.4@114.8,53.6
  Top Layer w0.5: 102.4,46.05 102.975,45.475 v1(102.975,43.825) ; v1(104.25,41.175) 104.275,41.2 107.75,41.2 110.8,44.25 110.8,47.473 111.312,47.985 111.312,49.037 111.975,49.7 C5.1@112.85,49.7 113.6,49.7 113.824,49.476 R5.2@115.1,49.476 R8.2@116.675,49.476 R6.2@118.275,49.476
  Bottom Layer w0.5: v1(102.975,43.825) 104.25,42.55 v1(104.25,41.175)
+5V_RELAY: C11.2 C34.1 C35.1 DD1.20 K1.1 K2.1 K3.1 L2.2 R12.1 R14.1 R39.2 R43.2 R44.2 R47.2 R48.2 R51.2 R52.2 VD18.2 VD19.2 VD20.2 XP7.1 | length 165.2
  Top Layer w0.2: DD1.20@90.225,75.225 90.225,72.6 90.6,72.225 C11.2@91.475,72.225 91.475,71.275 91.725,71.025 93.957,71.025 98.182,66.8 v1(98.5,66.8)
  Top Layer w0.5: v1(83.425,104.425) 83.725,104.125 R14.1@83.725,102.875 84.975,102.875 86.425,101.425 R12.1@92.175,101.425 v1(93.325,101.425) ; R39.2@95.876,58.95 95.876,60.124 ; v1(96.375,101.775) 98.906,101.775 102.431,105.3 v1(105.325,105.3) ; R52.2@107.625,96.624 110.974,96.624 v1(111.95,97.6) ; R48.2@111.624,77.475 112.425,77.475 v1(112.7,77.75) ; v2(113.306,72.254) 113.396,72.254 113.901,71.749 R44.2@114.775,71.749 117.274,71.749 v1(118.274,72.749) ; v1(115.081,77.354) 115.084,77.35 117.026,77.35 VD18.2@117.075,77.399 117.1,77.374 R43.2@117.1,75.199 v1(118.274,75.199) ; R47.2@117.074,86.6 VD19.2@117.074,88.773 ; R51.2@117.074,97.725 VD20.2@117.074,99.898
  Top Layer w1: 105.15,59.575 105.15,67.075 v2(107.1,69.025) ; v1(109.35,105.3) 110.25,106.2 113.675,106.2 115.075,104.8 115.075,99.899 ; v1(114.249,99.899) 115.075,99.899 ; VD18.2@117.075,77.399 121.126,77.399 ; VD19.2@117.075,88.774 120.876,88.774 ; K1.1@121.4,75.3 121.4,77.125 121.126,77.399 ; 115.075,99.899 VD20.2@117.075,99.899 120.976,99.899 121.4,99.475 K3.1@121.4,97.8 122.15,97.8 123.2,96.75 123.2,91.098 120.876,88.774 ; 120.876,88.774 121.4,88.25 K2.1@121.4,86.7 121.4,85.925 123.2,84.125 123.2,79.473 121.126,77.399
  Bottom Layer w0.5: XP7.1@72.35,106.175 72.35,104.8 73.45,103.7 82.7,103.7 v1(83.425,104.425) ; v1(93.325,101.425) 96.025,101.425 v1(96.375,101.775) ; v1(94.8,65.725) 95.875,66.8 v1(98.5,66.8) ; v1(105.325,105.3) v1(109.35,105.3) ; v1(112.7,77.75) 114.684,77.75 v1(115.081,77.354) ; v1(118.274,72.749) v1(118.274,75.199)
  Bottom Layer w1: v2(107.1,69.025) 111.725,69.025 113.3,70.6 113.3,72.248 v2(113.306,72.254) ; v1(111.95,97.6) v1(114.249,99.899)
BL_KB: DD1.25 R61.1 | length 34.9
  Top Layer w0.2: R61.1@76.575,71.2 77.5,71.2 78.7,70 81.225,70 81.379,70.154 v1(81.379,70.228) ; DD1.25@93.675,76.675 94.397,76.675 95.125,75.947 95.125,72.55 94.925,72.35 94.925,70.764 97.339,68.35 v1(97.85,68.35)
  Bottom Layer w0.2: v1(81.379,70.228) 81.25,70.099 81.25,69.21 81.71,68.75 88.75,68.75 89.375,69.375 95.075,69.375 96.1,68.35 v1(97.85,68.35)
C1: R25.1 VD2.2 XP2.2 XP4.1 | length 24.4
  Top Layer w0.5: R25.1@100.65,94.85 VD2.2@100.65,97.875
  Top Layer w1: XP4.1@94.7,114.475 94.7,101.35 95.85,100.2 99.875,100.2 100.65,99.425 VD2.2@100.65,97.875
C2: R58.1 VD3.2 XP6.2 XP12.1 | length 22.5
  Top Layer w0.5: XP6.2@84.7,106.185 XP12.1@84.7,114.475 ; v1(86.625,99.25) 87.55,98.325 VD3.2@89.025,98.325 89.025,97.675 90.175,96.525 R58.1@90.175,95.25 R58.1@90.095,95.33
  Bottom Layer w0.5: XP6.2@84.71,106.175 84.71,101.165 v1(86.625,99.25)
CANH: DD1.19 FU2.1 VD4.2 | length 45
  Top Layer w0.2: DD1.19@89.725,75.225 89.725,70.925 90.125,70.525 93.75,70.525 100.1,64.175 101.075,64.175 v1(102.825,62.425) ; v1(107.65,54.55) 107.65,53.5 108.618,52.532 VD4.2@110.612,52.532
  Top Layer w0.3: FU2.1@105.25,47.475 105.25,49.725 106.025,50.5 108.85,50.5 109.875,51.525 110.375,51.525 110.612,51.762 VD4.2@110.612,52.532
  Bottom Layer w0.2: v1(102.825,62.425) 103.025,62.225 103.907,62.225 107.65,58.482 v1(107.65,54.55)
CANH_F: FU2.2 XP5.1 | length 22.2
  Top Layer w0.5: XP5.1@88.6,37.525 88.6,41.175 90.4,42.975 105,42.975 105.25,43.225 FU2.2@105.25,44.275
CANL: DD1.18 FU3.1 VD4.1 | length 43.9
  Top Layer w0.2: DD1.18@89.225,75.225 89.225,70.325 89.525,70.025 93.543,70.025 99.893,63.675 100.868,63.675 101.8,62.743 v1(101.8,62.3)
  Top Layer w0.3: v1(106.65,49.725) 108.375,49.725 108.575,49.525 FU3.1@108.575,48.3 110.125,48.3 110.612,48.787 VD4.1@110.612,50.5
  Bottom Layer w0.2: v1(101.8,62.3) 101.96,62.3 102.535,61.725 103.7,61.725 106.95,58.475 106.95,50.025 v1(106.65,49.725)
CANL_F: FU3.2 XP5.2 | length 20.4
  Top Layer w0.5: XP5.2@93.6,37.525 93.6,40.525 95.25,42.175 106.525,42.175 108.575,44.225 FU3.2@108.575,45.1
COUNTER_1: C18.2 DD1.45 R25.2 R26.2 VD9.3 | length 28.1
  Top Layer w0.2: v1(86.4,86.475) 86.825,86.475 88.225,85.075 DD1.45@88.225,83.625 ; v1(94.375,85.075) 95.95,85.075 96.975,86.1 98.25,86.1 98.659,86.509 VD9.3@98.659,87.376
  Top Layer w0.5: C18.2@97.175,92.95 98.05,92.95 98.401,93.301 R26.2@98.9,93.301 ; VD9.3@98.659,87.376 98.659,91.959 98.9,92.2 R26.2@98.9,93.301 ; R25.2@100.65,93.301 R26.2@98.9,93.301
  Bottom Layer w0.2: v1(86.4,86.475) 87.743,86.475 88.093,86.825 89.222,86.825 89.247,86.8 92.425,86.8 94.15,85.075 v1(94.375,85.075)
COUNTER_2: C36.2 DD1.33 R58.2 R59.2 VD5.3 | length 35.2
  Top Layer w0.2: DD1.33@93.675,80.675 95.459,80.675 v1(95.605,80.529) ; VD5.3@95.116,91.999 95.116,93.491 v1(95.275,93.65) ; v1(101.55,88.075) 102.25,87.375 v1(102.25,79.875)
  Top Layer w0.5: R58.2@90.175,93.701 90.276,93.6 91.799,93.6 R59.2@91.9,93.701 92.626,93.701 93.077,93.25 C36.2@93.6,93.25 93.6,92.3 93.901,91.999 VD5.3@95.116,91.999
  Bottom Layer w0.2: v1(95.275,93.65) 95.695,93.23 97.828,93.23 100.9,90.157 100.9,88.725 v1(101.55,88.075) ; v1(95.605,80.529) 95.704,80.529 96.15,80.975 97.694,80.975 98.519,80.15 101.975,80.15 v1(102.25,79.875)
EARTH: XP10.1 XP13.1 XP13.2 | length 92.6
  Bottom Layer w2: XP13.2@112.5,114.475 XP13.1@117.5,114.475 119.105,114.475 126.9,106.68 126.9,76.3 130.975,72.225 130.975,38.8 132.25,37.525 XP10.1@135.825,37.525
GND: C1.1 C2.1 C4.2 C5.2 C6.1 C7.1 C8.2 C9.2 C10.1 C11.1 C12.1 C13.1 C14.1 C15.1 C16.1 C17.1 C18.1 C19.1 C20.1 C22.2 C23.2 C24.1 C25.2 C26.2 C27.2 C28.2 C29.2 C30.1 C31.1 C32.2 C34.2 C35.2 C36.1 C37.2 C38.2 C39.2 C40.2 DA2.11 DA2.19 DA2.20 DA2.21 DA3.9 DA3.11 DA4.2 DA5.9 DA5.11 DD1.5 DD1.21 DD1.41 DD2.4 J1.2 J2.2 R4.2 R7.2 R9.2 R10.2 R21.1 R22.1 R26.1 R28.1 R31.1 R34.1 R35.1 R38.1 R41.1 R42.1 R46.1 R50.1 R54.1 R59.1 U1.2 U1.3 U2.2 U2.3 U3.2 U3.3 VD1.1 VD2.1 VD3.1 VD4.3 VD5.1 VD7.2 VD8.2 VD9.1 VD10.1 VD14.1 VD15.1 VD16.1 VD17.1 VD21.2 VD22.2 VD23.2 VD25.1 VD26.1 VD29.1 VD30.1 VD31.1 VD32.1 VD33.1 VD34.1 VD35.1 VD36.1 VT3.2 VT4.2 VT5.2 VT6.2 VT7.2 VT8.2 VT9.2 VT10.2 XP1.1 XP3.2 XP4.2 XP15.1 XP16.5 | length 5.2
  Top Layer w0.2: DD1.5@85.275,80.175 86.475,80.175 ; 90.225,82.35 DD1.41@90.225,83.625 90.225,85.2 ; DD1.21@90.725,75.225 90.725,76.4
  other v1: 127.675,29.85 102.3,30.075 102.95,31.625 127.675,31.675 114.725,33.325 124.6,33.325 127.575,33.45 71.55,33.975 119.475,34.875 82.5,35 87.5,35 92.5,35 97.5,35 102.5,35 112.5,35.025 127.525,35.45 105.575,36.1 127.5,37.35 127.55,39.425 85,40 90,40 95,40 105,40 109.5,41.05 91.8,41.775 127.55,41.9 111.7,42.6 125.375,42.8 121.825,42.95 82,42.975 80.35,43.075 87.375,43.125 76,43.525 101.725,43.9 127.5,44.025 101.9,45.025 127.5,46.075 117.725,46.15 78.575,46.425 117.375,47 127.45,47.95 80.32,48.75 75.125,49.125 76.675,49.325 127.425,49.55 70.65,49.925 100,50 94.1,51.1 120.8,51.375 111.75,51.5 127.425,52.025 124.325,52.05 100.55,52.75 112.8,52.896 77.55,53.625 78.475,53.625 96.875,54.325 127.425,54.5 114.675,54.75 116.375,54.75 77.55,54.85 78.475,54.85 102.5,55 114.675,55.85 116.375,55.85 74.675,56.175 112.6,56.925 127.425,56.975 87.875,57.075 120.675,57.425 100.525,57.6 80.275,57.85 72.85,58.3 80.1,58.85 127.425,59.45 79,60.55 79.925,60.55 120.925,60.55 79,61.775 79.925,61.775 127.425,61.925 112.15,62.25 112.15,63.55 119.675,63.95 76.5,64.175 73.475,64.25 127.425,64.4 80.8,64.875 67.5,65 77.5,65 117.5,65 124.575,65.8 127.625,66.275 115.6,66.45 78.925,66.55 82.575,66.55 119.175,67.625 124.3,67.75 77.025,68.05 89.475,68.05 92.325,68.075 80.825,68.325 104.325,68.425 115.3,68.9 127.75,68.925 120,70 110.6,71.125 85.025,71.25 80,71.4 123.625,72.225 71.525,72.375 122.825,73.575 74.875,73.65 107.425,73.675 107.225,74.65 114.85,74.65 106.625,75.325 93.575,75.925 69.775,76.7 90.7,76.8 123.1,77 76.125,77.175 78.825,77.275 80.3,77.275 87.55,77.625 111.8,78.55 120,79.075 67.925,79.525 91.075,79.925 86.8,80.15 115.275,81.7 113.125,81.8 90.2,81.95 104.15,82.325 94.875,83 95.975,83 111.45,83.2 103.95,83.45 110.2,84.725 120.3,84.75 76.325,85 83.975,87.125 72.175,87.15 113.125,87.175 70.15,87.75 123.125,87.85 97.2,88.15 80.95,88.5 89.8,88.85 108.7,88.925 115,90 82.5,90.125 120.55,90.625 109.9,90.85 113.075,90.85 115.45,93 103.125,93.15 88.775,93.7 82.8,94.7 81.925,94.725 102.075,94.8 71.3,94.9 115.525,95.2 119.3,95.925 98.775,95.975 113.05,96.05 72.375,97.375 98.175,97.925 84.125,98.125 91.5,98.338 68.75,98.825 123.15,99.025 80.875,99.975 105,100 110,100 93.6,100.25 77.175,101.25 113.025,101.25 71.175,101.275 102.025,101.35 120.85,101.45 76.425,101.925 70.275,102.325 72.5,102.35 69.375,103.05 123,103.775 103.925,104.225 112.5,105 116.7,105.775 62.55,107 118.45,107 109.275,107.425 103.975,107.75 90,110 100,110 97.5,115 98.9,117.05 74.775,118.425 90.15,118.675 78.525,118.8 95.15,118.825 83.95,119.025 102.25,120.95 105.475,121.175
ISP_START: DD1.4 J2.1 R24.2 | length 26.6
  Top Layer w0.2: R24.2@69.076,86.024 R24.2@69.076,86.05 ; v1(81.225,81) 81.55,80.675 DD1.4@85.275,80.675
  Top Layer w0.5: J2.1@63.6,84.45 63.6,85.375 64.275,86.05 R24.2@69.076,86.05
  Bottom Layer w0.2: v1(67.925,86.075) 69.525,86.075 70.625,84.975 70.625,84.4 71.325,83.7 72.153,83.7 74.153,81.7 80.525,81.7 v1(81.225,81)
L_FLOW_VALVE_RELAY: DD1.12 R45.2 R46.2 R55.1 | length 83.8
  Top Layer w0.2: DD1.12@85.275,76.675 84.45,76.675 84.275,76.5 84.275,70.925 84.675,70.525 86.975,70.525 v1(87.4,70.95) ; v1@96.183,71.05 v1(96.055,71.178) 99.611,71.178 100.9,72.468 100.9,74.625 v1(101.1,74.825) ; v1(108.05,80.2) 108.875,79.375 108.875,77.075 108.171,76.371 108.171,75.254 108.626,74.799 R45.2@108.626,73.725
  Top Layer w0.3: v1(103.425,74.4) 103.425,71.3 104.05,70.675 106.725,70.675 107.5,71.45 107.5,71.7 107.899,72.099 R46.2@108.625,72.099
  Top Layer w0.5: v1(104.475,93.925) 104.65,94.1 104.65,98.013 106.6,99.963 106.6,108.519 105.075,110.044 R55.1@105.075,112.675 ; R46.2@108.625,72.099 R45.2@108.625,73.724
  Bottom Layer w0.2: v1(87.4,70.95) 87.525,71.075 95.951,71.075 v1(96.055,71.178)
  Bottom Layer w0.3: v1(101.1,74.825) 101.525,74.4 v1(103.425,74.4) ; v1(104.475,93.925) 105.275,93.925 106.45,92.75 106.45,92.114 106.15,91.814 106.15,84.425 108.05,82.525 v1(108.05,80.2)
L_IN: F1.1 F2.1 F3.1 XP10.3 | length 12.2
  Top Layer w5: XP10.3@145.825,37.525 145.825,49.75
LED_ERROR: DD1.10 R16.2 | length 78
  Top Layer w0.2: DD1.10@85.275,77.675 83.65,77.675 83.275,77.3 83.275,69.807 83.557,69.525 93.336,69.525 99.686,63.175 100.325,63.175 v1(100.775,62.725) ; v1(98.8,33.8) R16.2@99.976,33.8 ; v1(106.675,33.8) 107.675,34.8 v1(107.675,40.2)
  Bottom Layer w0.2: v1(98.8,33.8) v1(106.675,33.8) ; v1(100.775,62.725) 100.775,61.975 101.525,61.225 103.493,61.225 106.45,58.268 106.45,50.6 105.925,50.075 103.827,50.075 103.3,49.548 103.3,48.5 104.075,47.725 106.875,47.725 107.675,46.925 v1(107.675,40.2)
LED_STATE: DD1.9 R17.2 | length 70.2
  Top Layer w0.2: DD1.9@85.275,78.175 83.05,78.175 82.775,77.9 82.775,69.6 83.35,69.025 93.129,69.025 v1@99.675,62.479 ; R17.2@105.324,33.8 105.324,34.749 105.625,35.05 106.3,35.05 106.725,35.475 v1(106.725,40.25)
  Bottom Layer w0.2: v1(99.85,62.4) 99.85,62.193 101.318,60.725 103.286,60.725 105.95,58.061 105.95,50.807 105.718,50.575 103.62,50.575 102.8,49.755 102.8,48.293 103.868,47.225 106.668,47.225 107.175,46.718 107.175,41.775 106.725,41.325 v1(106.725,40.25)
LFL_L: K3.11 XP11.2 | length 22.5
  Bottom Layer w2: XP11.2@138.15,114.475 138.15,110.025 136.6,108.475 136.6,100.65 139.45,97.8 K3.11@143.5,97.8
M_VALVE_RELAY: DD1.11 R49.2 R50.2 R56.1 | length 72.3
  Top Layer w0.2: DD1.11@85.275,77.175 84,77.175 83.775,76.95 83.775,70.275 84.025,70.025 88.15,70.025 v1(88.5,70.375) ; v1@96.608,70.375 v1(96.58,70.403) 99.543,70.403 101.4,72.261 101.4,74.125 101.825,74.55 101.825,74.975 103.08,76.23 103.08,85.53 103.574,86.024 R50.2@104.225,86.024
  Top Layer w0.5: R50.2@104.225,86.024 R49.2@106.426,86.025 ; v1(105.7,92.425) 106.25,92.975 106.25,97.35 108.2,99.3 R56.1@108.2,112.675
  Bottom Layer w0.2: v1(88.5,70.375) 88.528,70.403 v1(96.58,70.403)
  Bottom Layer w0.5: v1(105.4,86.025) 105.4,92.125 v1(105.7,92.425)
MAIN_L: K2.11 XP11.1 | length 37.4
  Top Layer w2: XP11.1@143.15,114.475 143.15,111.7 144.6,110.25 148.45,110.25 150.5,108.2 150.5,91.35 145.85,86.7 K2.11@143.5,86.7
MISO: DD1.26 DD2.2 | length 43.8
  Top Layer w0.2: DD1.26@93.675,77.175 94.604,77.175 95.625,76.154 95.625,72.333 v1(95.78,72.179)
  Top Layer w0.5: DD2.2@74.02,83.225 v1(74.02,84.695)
  Bottom Layer w0.2: v1(74.02,84.695) 75.515,83.2 81.785,83.2 81.985,83.4 82.8,83.4 83.375,82.825 83.375,79.25 82.8,78.675 81.875,78.675 81.375,78.175 81.375,77.51 81.785,77.1 82.875,77.1 83.375,76.6 83.375,73.525 84.95,71.95 87.45,71.95 87.825,71.575 94.375,71.575 94.9,72.1 95.701,72.1 v1(95.78,72.179)